# Altium PCB PCB2.PcbDoc
Units mil, origin at the board's own origin, x right, y up, seen from the top; angles counter-clockwise.
Board outline 6000 x 4000 mil, 2 copper layers (Top Layer, Bottom Layer); 25 components, 18 nets, 98 pads, 0 vias.
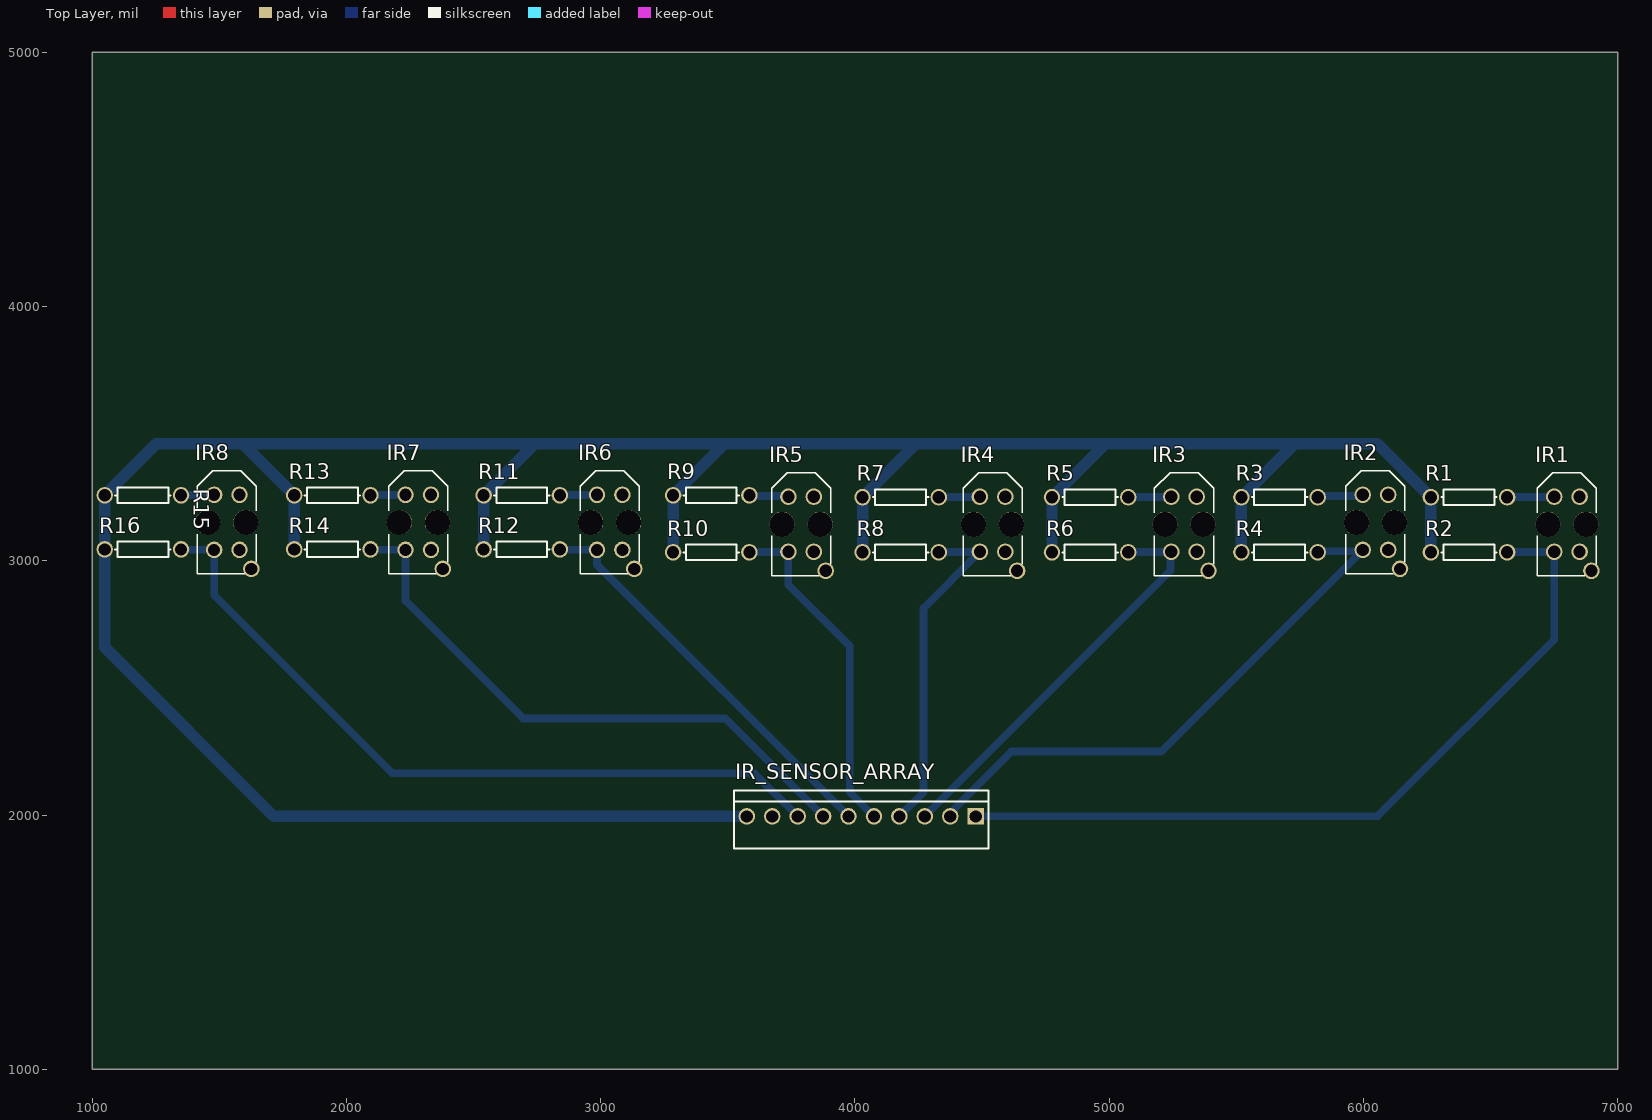
[diagram p0: Top Layer view]
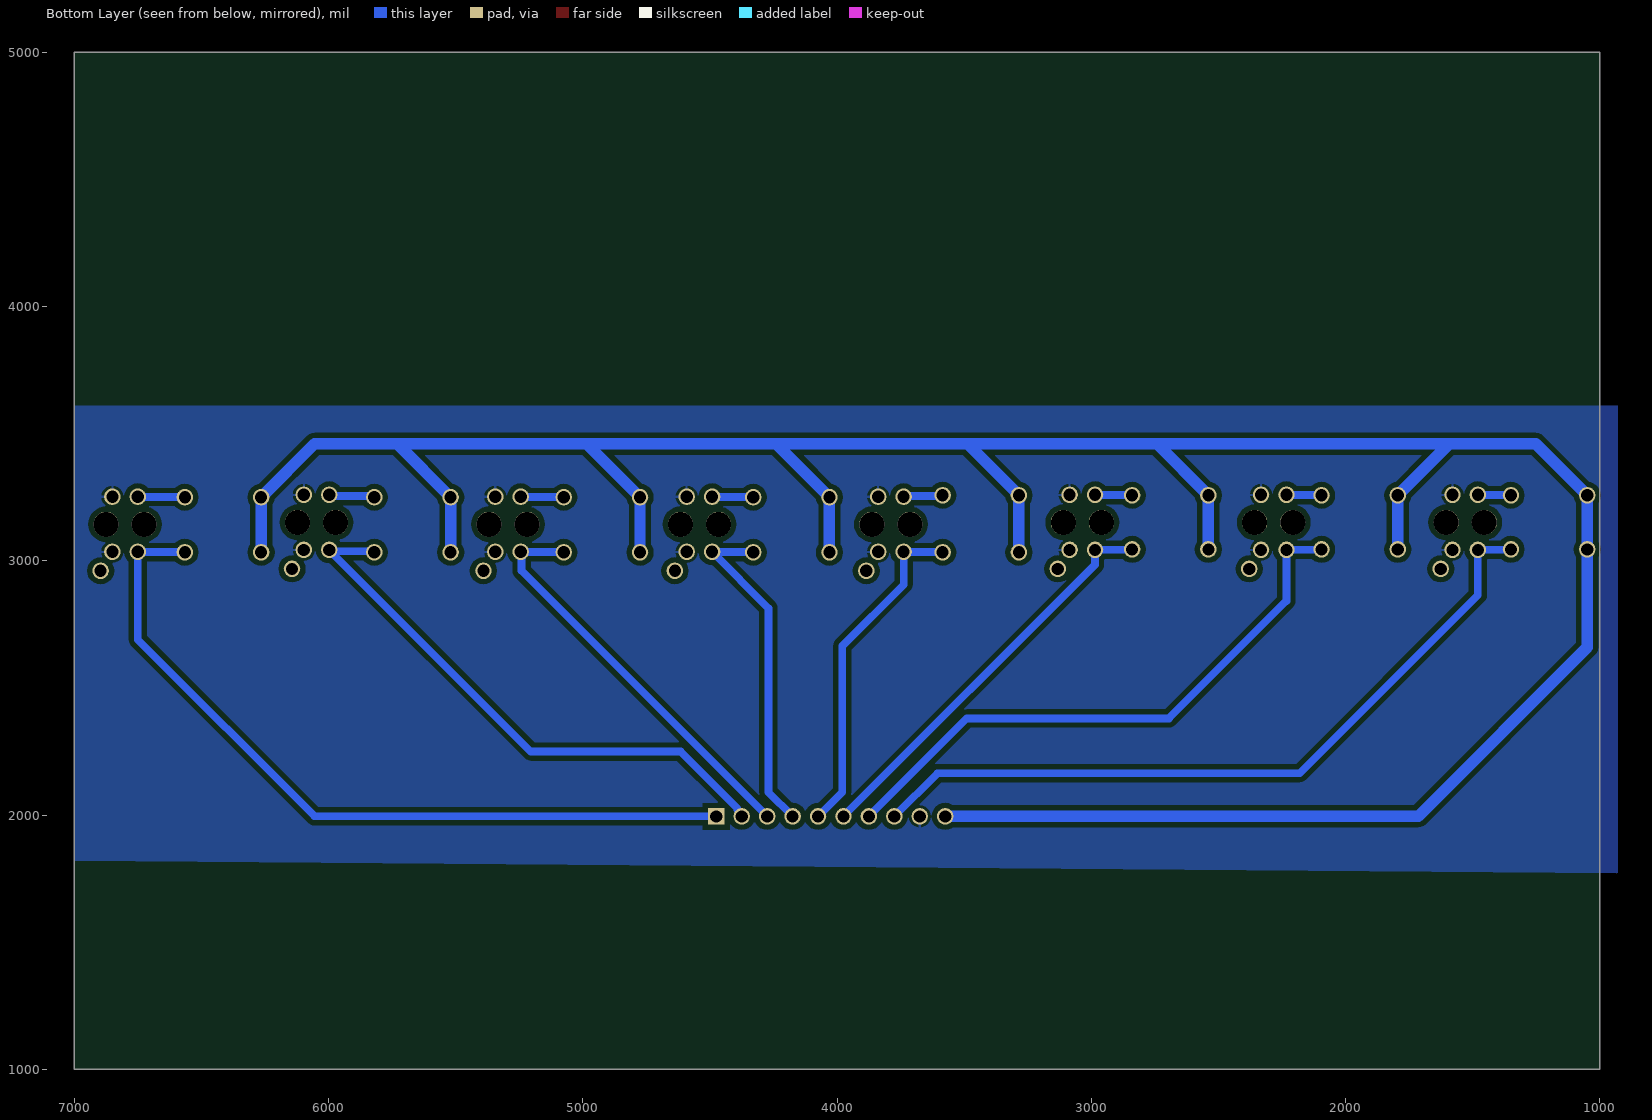
[diagram p1: Bottom Layer view, seen from below]

## Layer stack, top to bottom
Top Solder: solder mask 0.4, Solder Resist, Dk 3.5
Top Layer: signal copper 1.4
Dielectric 1: dielectric 12.6, FR-4, Dk 4.8
Bottom Layer: signal copper 1.4
Bottom Solder: solder mask 0.4, Solder Resist, Dk 3.5

## Board outline
1000,1000 7000,1000 7000,5000 1000,5000

## Design rules (kind name [scope] priority, off if disabled: settings)
Clearance [All] p1: gap=20 ignorepadtopadclearanceinfootprint=FALSE except(30: Arc-Arc Arc-Track Track-Track)
PolygonConnect [All] p1: connectstyle=Relief reliefconductorwidth=10 reliefentries=4 polygonreliefangle="90 Angle" airgapwidth=10
RoutingLayers [All] p1: top layer_v5=FALSE bottom layer_v5=TRUE
RoutingVias [All] p1: holewidth=28 width=50 viastyle="Through Hole" minholewidth=28 minwidth=50 maxholewidth=28 maxwidth=50
SolderMaskExpansion [All] p1: expansion=4 istentingtop=FALSE
Width [All] p1: maxlimit=45 minlimit=15 preferedwidth=30 minimp=50.000000 maximp=50.000000 favimp=50.000000
29 further rules are at their usual default settings.

## Components (designator, comment, footprint, x,y, rotation, side; value= is the part's Value field where it differs from the comment)
IR1 "TCRT5000" OPTO_TCRT5000 6800,3143.7 r90 top
IR2 "TCRT5000" OPTO_TCRT5000 6047.14,3151.3 r90 top
IR3 "TCRT5000" OPTO_TCRT5000 5294.29,3143.7 r90 top
IR4 "TCRT5000" OPTO_TCRT5000 4541.43,3143.7 r90 top
IR5 "TCRT5000" OPTO_TCRT5000 3788.57,3143.7 r90 top
IR6 "TCRT5000" OPTO_TCRT5000 3035.71,3151.3 r90 top
IR7 "TCRT5000" OPTO_TCRT5000 2282.86,3151.3 r90 top
IR8 "TCRT5000" OPTO_TCRT5000 1530,3151.3 r90 top
IR_SENSOR_ARRAY "61901011121" 61901011121 4025,1995 r0 top
R1 "Res1" AXIAL-0.3 6415,3250 r0 top value=220
R2 "Res1" AXIAL-0.3 6415,3033.46 r180 top value=4.7K
R3 "Res1" AXIAL-0.3 5670,3250 r0 top value=220
R4 "Res1" AXIAL-0.3 5670,3033.46 r180 top value=4.7K
R5 "Res1" AXIAL-0.3 4925,3250 r0 top value=220
R6 "Res1" AXIAL-0.3 4925,3033.46 r180 top value=4.7K
R7 "Res1" AXIAL-0.3 4180,3250 r0 top value=220
R8 "Res1" AXIAL-0.3 4180,3033.46 r180 top value=4.7K
R9 "Res1" AXIAL-0.3 3435,3257.6 r0 top value=220
R10 "Res1" AXIAL-0.3 3435,3033.46 r180 top value=4.7K
R11 "Res1" AXIAL-0.3 2690,3257.6 r0 top value=220
R12 "Res1" AXIAL-0.3 2690,3045 r180 top value=4.7K
R13 "Res1" AXIAL-0.3 1945,3257.6 r0 top value=220
R14 "Res1" AXIAL-0.3 1945,3045 r180 top value=4.7K
R15 "Res1" AXIAL-0.3 1200,3257.6 r0 top value=220
R16 "Res1" AXIAL-0.3 1200,3045 r180 top value=4.7K

## Footprints (in the part's own frame and the unit in brackets; to place one, negate y for a bottom-side part, rotate by r counter-clockwise, add the part's x,y. Pads: shape width x height; smd on the part's side, far side on the other; paste and mask are expansions set on the pad)
61901011121 [mil] "2.54mm Male Locking Header, 10p"
  rect 65x65 hole 48: 1(450,0)
  round 65 hole 48: 2(350,0) 3(250,0) 4(150,0) 5(50,0) 6(-50,0) 7(-150,0) 8(-250,0) 9(-350,0) 10(-450,0)
  silkscreen extent -501,-126 501,102, body extent -500,-126 500,102, height 455
AXIAL-0.3 [mil] "Axial Device, Thru-Hole; 2 Leads; 0.3 in Pin Spacing"
  round 65 hole 48: 1(-150,0) 2(150,0)
  silkscreen extent -109,-30 109,30
OPTO_TCRT5000 [mil]
  round 65 hole 48: A(108.27,50) CATH(108.27,-50) COLL(-108.27,50) E(-108.27,-50)
  round 65 hole 48 unplated: ""(-183.07,-96.46)
  round 98.43 hole 98.43 unplated: ""(0,74.8) ""(0,-74.8)
  silkscreen extent -203,-116 203,116

## Part data
IR1 IR2 IR3 IR4 IR5 IR6 IR7 IR8: "950 nm 60 mA Through Hole Reflective Optical Sensor with Transistor Output", Package=None, Availability=Unavailable, MP=TCRT5000, Price=None
IR_SENSOR_ARRAY: "WR-WTB 2.54mm Male Locking Header, 10p", ComponentLink1Description=Manufacturer, ComponentLink1URL=http://www.we-online.de, ComponentLink2Description=Datasheet, ComponentLink2URL=http://katalog.we-online.de/em/datasheet/6190xx11121.pdf, Part Number=61901011121, Pin Number=10, Pitch="2.54 mm", Published Date="June 2017", Publisher="Wurth Elektronik"
R1 R2 R3 R4 R5 R6 R7 R8 R9 R10 R11 R12 R13 R14 R15 R16: "Resistor", LatestRevisionDate=17-Jul-2002, LatestRevisionNote="Re-released for DXP Platform.", PackageDescription="Axial Device, Thru-Hole; 2 Leads; 0.3 in Pin Spacing", PackageReference=AXIAL-0.3, Published=8-Jun-2000, Publisher="Altium Limited"

## Nets (pads, with @x,y where several pads share a name; then routed paths per layer and width w, separated by ;. In a path a pad name is that pad's centre, name@x,y a point inside that pad or via, vN(x,y) a via of type N, cw(c..) or ccw(c..) an arc to the next point about the centre after c; other vN are vias at no path point)
5V_VCC: IR_SENSOR_ARRAY.10 R1.1 R2.2 R3.1 R4.2 R5.1 R6.2 R7.1 R8.2 R9.1 R10.2 R11.1 R12.2 R13.1 R14.2 R15.1 R16.2 | length 12049
  Bottom Layer w45: R14.2 R13.1 1592.6,3460 ; R12.2 R11.1 2742.4,3460 ; R10.2 R9.1 3487.4,3460 ; IR_SENSOR_ARRAY.10 1715,1995 1050,2660 R16.2 R15.1 1252.4,3460 1592.6,3460 ; R8.2 R7.1 4240,3460 ; R6.2 R5.1 4985,3460 ; R4.2 R3.1 5730,3460 ; R2.2 R1.1 6055,3460 5730,3460 ; 1592.6,3460 2742.4,3460 ; 2742.4,3460 3487.4,3460 ; 3487.4,3460 4240,3460 ; 4240,3460 4985,3460 ; 4985,3460 5730,3460
A0_IR1: IR1.COLL IR_SENSOR_ARRAY.1 R2.1 | length 3092.7
  Bottom Layer w30: IR_SENSOR_ARRAY.1 6055,1995 6750,2690 IR1.COLL ; R2.1 6565.98,3034.45 IR1.COLL@6749.02,3034.45
A1_IR2: IR2.COLL IR_SENSOR_ARRAY.2 R4.1 | length 2239.1
  Bottom Layer w30: IR_SENSOR_ARRAY.2 4375,2004.47 4392.5,2021.97 4392.5,2027 4406.79,2041.29 4428,2062.5 4615.5,2250 5204.11,2250 IR2.COLL@5992.36,3038.25 ; R4.1 5824.78,3038.25 IR2.COLL@5992.36,3038.25 ; IR2.COLL IR2.COLL@5992.36,3038.25
A2_IR3: IR3.COLL IR_SENSOR_ARRAY.3 R6.1 | length 1610.6
  Bottom Layer w30: IR_SENSOR_ARRAY.3 5240.91,2960.91 5240.91,3032.05 IR3.COLL ; R6.1 5075.98,3034.45 IR3.COLL@5243.3,3034.45
A3_IR4: IR4.COLL IR_SENSOR_ARRAY.4 R8.1 | length 1333.7
  Bottom Layer w30: IR_SENSOR_ARRAY.4 4270,2090 4270,2814 IR4.COLL 4490.44,3034.45 4330.98,3034.45 R8.1
A4_IR5: IR5.COLL IR_SENSOR_ARRAY.5 R10.1 | length 1334.2
  Bottom Layer w30: R10.1 3585.98,3034.45 3737.59,3034.45 IR5.COLL 3738.57,2906.43 3980,2665 3980,2090 IR_SENSOR_ARRAY.5
A5_IR6: IR6.COLL IR_SENSOR_ARRAY.6 R12.1 | length 1602.9
  Bottom Layer w30: R12.1 2840.98,3044.02 IR6.COLL@2984.73,3044.02 ; IR6.COLL 2985.71,2984.29 IR_SENSOR_ARRAY.6
A6_IR7: IR7.COLL IR_SENSOR_ARRAY.7 R14.1 | length 2332.6
  Bottom Layer w30: R14.1 2095.98,3044.02 2231.87,3044.02 IR7.COLL 2232.86,2842.14 2695,2380 3490,2380 IR_SENSOR_ARRAY.7
A7_IR8: IR8.COLL IR_SENSOR_ARRAY.8 R16.1 | length 2964.2
  Bottom Layer w30: R16.1 1350.98,3044.02 1479.02,3044.02 IR8.COLL 1480,2865 2180,2165 3605,2165 IR_SENSOR_ARRAY.8
GND: IR1.CATH IR1.E IR2.CATH IR2.E IR3.CATH IR3.E IR4.CATH IR4.E IR5.CATH IR5.E IR6.CATH IR6.E IR7.CATH IR7.E IR8.CATH IR8.E IR_SENSOR_ARRAY.9
NetIR1_A: IR1.A R1.2 | length 185.8
  Bottom Layer w30: R1.2 6565.98,3250.98 6749.02,3250.98 IR1.A
NetIR2_A: IR2.A R3.2 | length 181.1
  Bottom Layer w30: R3.2 5824.78,3254.78 5992.36,3254.78 IR2.A
NetIR3_A: IR3.A R5.2 | length 170.1
  Bottom Layer w30: R5.2 5075.98,3250.98 5243.3,3250.98 IR3.A
NetIR4_A: IR4.A R7.2 | length 162.2
  Bottom Layer w30: R7.2 4330.98,3250.98 4490.44,3250.98 IR4.A
NetIR5_A: IR5.A R9.2 | length 155.9
  Bottom Layer w30: R9.2 3587.82,3254.78 3735.76,3254.78 IR5.A
NetIR6_A: IR6.A R11.2 | length 146.5
  Bottom Layer w30: R11.2 2840.98,3258.58 2984.73,3258.58 IR6.A
NetIR7_A: IR7.A R13.2 | length 138.7
  Bottom Layer w30: R13.2 2095.98,3258.58 2231.87,3258.58 IR7.A
NetIR8_A: IR8.A R15.2 | length 130.8
  Bottom Layer w30: R15.2 1350.98,3258.58 1479.02,3258.58 IR8.A
pads on no net: IR1. IR2. IR3. IR4. IR5. IR6. IR7. IR8.

## Polygon pours and split planes (outlines as drawn)
GND on Bottom Layer "GND_L02_P000" (solid, remove dead copper, pour order 0): 930,3610 7000,3610 7000,1819.52 930,1770.64